# Altium PCB SixAxBase.PcbDoc
Units mm, origin at the board's own origin, x right, y up, seen from the top; angles counter-clockwise.
Board outline 152.4 x 101.6 mm, 4 copper layers (Top Layer, Signal Layer 1, Signal Layer 2, Bottom Layer), stack 0.778 mm thick; 1 components, 0 nets, 201 pads, 201 vias.
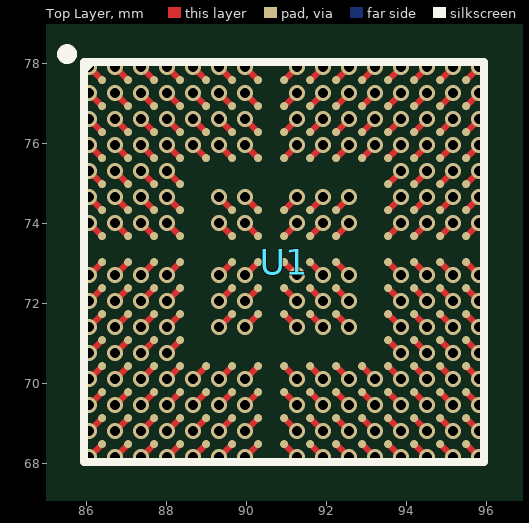
[diagram p0: Top Layer view]
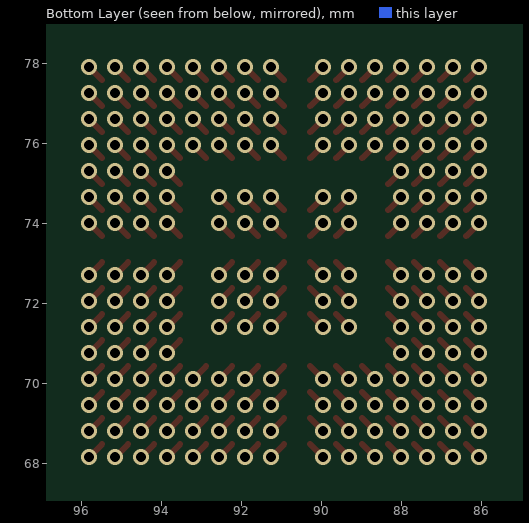
[diagram p1: Bottom Layer view, seen from below]
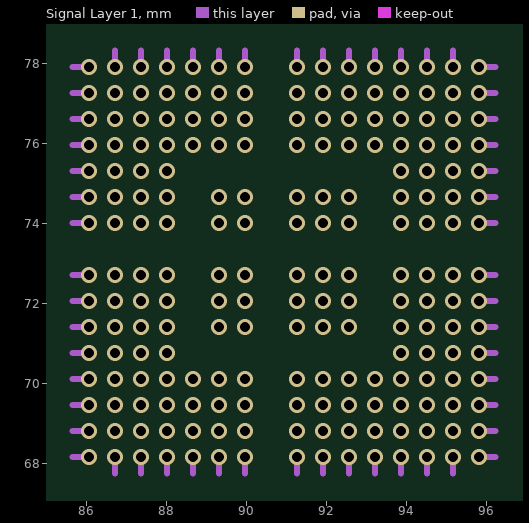
[diagram p2: Signal Layer 1]

## Layer stack, top to bottom
Top Solder: solder mask 0.0102, Solder Resist, Dk 3.5
Top Layer: signal copper 0.0356
Dielectric 1: core 0.254, FR-4, Dk 4.2
Signal Layer 1: signal copper 0.036
Dielectric 3: prepreg 0.127, Dk 4.2
Signal Layer 2: signal copper 0.036
Dielectric 2: core 0.254, Dk 4.2
Bottom Layer: signal copper 0.0356
Bottom Solder: solder mask 0.0102, Solder Resist, Dk 3.5

## Board outline
25.4,25.4 177.8,25.4 177.8,127 25.4,127

## Design rules (kind name [scope] priority, off if disabled: settings)
Clearance [All] p1: gap=0.127
ComponentClearance [All] p1: gap=0.127 collisioncheckmode=3 verticalgap=0.254 showdistances=FALSE
HoleToHoleClearance [All] p1: gap=0.127 allowstackedmicrovias=TRUE
MinimumSolderMaskSliver [All] p1: minsoldermaskwidth=0.127
PolygonConnect [All] p1: connectstyle=Relief reliefconductorwidth=0.254 reliefentries=4 polygonreliefangle="90 Angle" airgapwidth=0.254
RoutingVias [All] p1: holewidth=0.25 width=0.4 viastyle="Through Hole" minholewidth=0.25 minwidth=0.4 maxholewidth=0.3 maxwidth=0.5
SilkToSilkClearance [All] p1: silktosilkclearance=0.127
SilkToSolderMaskClearance [IsPad] p1: minsilkscreentomaskgap=0.127 clearancetoexposedcopper=TRUE
SolderMaskExpansion [All] p1: expansion=0.05
Width [All] p1: maxlimit=0.5 minlimit=0.127 preferedwidth=0.15
25 further rules are at their usual default settings.

## Components (designator, comment, footprint, x,y, rotation, side; value= is the part's Value field where it differs from the comment)
U1 "STM32F407IGH7" STM-UFBGA176+25 90.932,73.025 r0 top

## Footprints (in the part's own frame and the unit in brackets; to place one, negate y for a bottom-side part, rotate by r counter-clockwise, add the part's x,y. Pads: shape width x height; smd on the part's side, far side on the other; paste and mask are expansions set on the pad)
STM-UFBGA176+25 [mm] "BGA, 201-Balls, Body 10x10mm, Pitch 0.65mm"
  round 0.2 smd: A1(-4.55,4.55) A2(-3.9,4.55) A3(-3.25,4.55) A4(-2.6,4.55) A5(-1.95,4.55) A6(-1.3,4.55) A7(-0.65,4.55) A8(0,4.55) A9(0.65,4.55) A10(1.3,4.55) A11(1.95,4.55) A12(2.6,4.55) A13(3.25,4.55) A14(3.9,4.55) A15(4.55,4.55) B1(-4.55,3.9) B2(-3.9,3.9) B3(-3.25,3.9) B4(-2.6,3.9) B5(-1.95,3.9) B6(-1.3,3.9) B7(-0.65,3.9) B8(0,3.9) B9(0.65,3.9) B10(1.3,3.9) B11(1.95,3.9) B12(2.6,3.9) B13(3.25,3.9) B14(3.9,3.9) B15(4.55,3.9) C1(-4.55,3.25) C2(-3.9,3.25) C3(-3.25,3.25) C4(-2.6,3.25) C5(-1.95,3.25) C6(-1.3,3.25) C7(-0.65,3.25) C8(0,3.25) C9(0.65,3.25) C10(1.3,3.25) C11(1.95,3.25) C12(2.6,3.25) C13(3.25,3.25) C14(3.9,3.25) C15(4.55,3.25) D1(-4.55,2.6) D2(-3.9,2.6) D3(-3.25,2.6) D4(-2.6,2.6) D5(-1.95,2.6) D6(-1.3,2.6) D7(-0.65,2.6) D8(0,2.6) D9(0.65,2.6) D10(1.3,2.6) D11(1.95,2.6) D12(2.6,2.6) D13(3.25,2.6) D14(3.9,2.6) D15(4.55,2.6) E1(-4.55,1.95) E2(-3.9,1.95) E3(-3.25,1.95) E4(-2.6,1.95) E12(2.6,1.95) E13(3.25,1.95) E14(3.9,1.95) E15(4.55,1.95) F1(-4.55,1.3) F2(-3.9,1.3) F3(-3.25,1.3) F4(-2.6,1.3) F6(-1.3,1.3) F7(-0.65,1.3) F8(0,1.3) F9(0.65,1.3) F10(1.3,1.3) F12(2.6,1.3) F13(3.25,1.3) F14(3.9,1.3) F15(4.55,1.3) G1(-4.55,0.65) G2(-3.9,0.65) G3(-3.25,0.65) G4(-2.6,0.65) G6(-1.3,0.65) G7(-0.65,0.65) G8(0,0.65) G9(0.65,0.65) G10(1.3,0.65) G12(2.6,0.65) G13(3.25,0.65) G14(3.9,0.65) G15(4.55,0.65) H1(-4.55,0) H2(-3.9,0) H3(-3.25,0) H4(-2.6,0) H6(-1.3,0) H7(-0.65,0) H8(0,0) H9(0.65,0) H10(1.3,0) H12(2.6,0) H13(3.25,0) H14(3.9,0) H15(4.55,0) J1(-4.55,-0.65) J2(-3.9,-0.65) J3(-3.25,-0.65) J4(-2.6,-0.65) J6(-1.3,-0.65) J7(-0.65,-0.65) J8(0,-0.65) J9(0.65,-0.65) J10(1.3,-0.65) J12(2.6,-0.65) J13(3.25,-0.65) J14(3.9,-0.65) J15(4.55,-0.65) K1(-4.55,-1.3) K2(-3.9,-1.3) K3(-3.25,-1.3) K4(-2.6,-1.3) K6(-1.3,-1.3) K7(-0.65,-1.3) K8(0,-1.3) K9(0.65,-1.3) K10(1.3,-1.3) K12(2.6,-1.3) K13(3.25,-1.3) K14(3.9,-1.3) K15(4.55,-1.3) L1(-4.55,-1.95) L2(-3.9,-1.95) L3(-3.25,-1.95) L4(-2.6,-1.95) L12(2.6,-1.95) L13(3.25,-1.95) L14(3.9,-1.95) L15(4.55,-1.95) M1(-4.55,-2.6) M2(-3.9,-2.6) M3(-3.25,-2.6) M4(-2.6,-2.6) M5(-1.95,-2.6) M6(-1.3,-2.6) M7(-0.65,-2.6) M8(0,-2.6) M9(0.65,-2.6) M10(1.3,-2.6) M11(1.95,-2.6) M12(2.6,-2.6) M13(3.25,-2.6) M14(3.9,-2.6) M15(4.55,-2.6) N1(-4.55,-3.25) N2(-3.9,-3.25) N3(-3.25,-3.25) N4(-2.6,-3.25) N5(-1.95,-3.25) N6(-1.3,-3.25) N7(-0.65,-3.25) N8(0,-3.25) N9(0.65,-3.25) N10(1.3,-3.25) N11(1.95,-3.25) N12(2.6,-3.25) N13(3.25,-3.25) N14(3.9,-3.25) N15(4.55,-3.25) P1(-4.55,-3.9) P2(-3.9,-3.9) P3(-3.25,-3.9) P4(-2.6,-3.9) P5(-1.95,-3.9) P6(-1.3,-3.9) P7(-0.65,-3.9) P8(0,-3.9) P9(0.65,-3.9) P10(1.3,-3.9) P11(1.95,-3.9) P12(2.6,-3.9) P13(3.25,-3.9) P14(3.9,-3.9) P15(4.55,-3.9) R1(-4.55,-4.55) R2(-3.9,-4.55) R3(-3.25,-4.55) R4(-2.6,-4.55) R5(-1.95,-4.55) R6(-1.3,-4.55) R7(-0.65,-4.55) R8(0,-4.55) R9(0.65,-4.55) R10(1.3,-4.55) R11(1.95,-4.55) R12(2.6,-4.55) R13(3.25,-4.55) R14(3.9,-4.55) R15(4.55,-4.55)
  silkscreen extent -5.55,-5 5,5.32, body extent -5,-5 5,5, height 0.6

## Part data
U1: "ARM Cortex-M4 32-bit MCU+FPU, 210 DMIPS, 1024 kB Flash, 192 kB Internal RAM, 140 I/Os, 176-pin UFBGA, -40 to 105 degC, Tray"

## Via types
v1: diameter 0.4, hole 0.25, Top Layer to Bottom Layer, tented both sides, 201 vias

## Nets (pads, with @x,y where several pads share a name; then routed paths per layer and width w, separated by ;. In a path a pad name is that pad's centre, name@x,y a point inside that pad or via, vN(x,y) a via of type N, cw(c..) or ccw(c..) an arc to the next point about the centre after c; other vN are vias at no path point)
pads on no net: U1.A1 U1.A2 U1.A3 U1.A4 U1.A5 U1.A6 U1.A7 U1.A8 U1.A9 U1.A10 U1.A11 U1.A12 U1.A13 U1.A14 U1.A15 U1.B1 U1.B2 U1.B3 U1.B4 U1.B5 U1.B6 U1.B7 U1.B8 U1.B9 U1.B10 U1.B11 U1.B12 U1.B13 U1.B14 U1.B15 U1.C1 U1.C2 U1.C3 U1.C4 U1.C5 U1.C6 U1.C7 U1.C8 U1.C9 U1.C10 U1.C11 U1.C12 U1.C13 U1.C14 U1.C15 U1.D1 U1.D2 U1.D3 U1.D4 U1.D5 U1.D6 U1.D7 U1.D8 U1.D9 U1.D10 U1.D11 U1.D12 U1.D13 U1.D14 U1.D15 U1.E1 U1.E2 U1.E3 U1.E4 U1.E12 U1.E13 U1.E14 U1.E15 U1.F1 U1.F2 U1.F3 U1.F4 U1.F6 U1.F7 U1.F8 U1.F9 U1.F10 U1.F12 U1.F13 U1.F14 U1.F15 U1.G1 U1.G2 U1.G3 U1.G4 U1.G6 U1.G7 U1.G8 U1.G9 U1.G10 U1.G12 U1.G13 U1.G14 U1.G15 U1.H1 U1.H2 U1.H3 U1.H4 U1.H6 U1.H7 U1.H8 U1.H9 U1.H10 U1.H12 U1.H13 U1.H14 U1.H15 U1.J1 U1.J2 U1.J3 U1.J4 U1.J6 U1.J7 U1.J8 U1.J9 U1.J10 U1.J12 U1.J13 U1.J14 U1.J15 U1.K1 U1.K2 U1.K3 U1.K4 U1.K6 U1.K7 U1.K8 U1.K9 U1.K10 U1.K12 U1.K13 U1.K14 U1.K15 U1.L1 U1.L2 U1.L3 U1.L4 U1.L12 U1.L13 U1.L14 U1.L15 U1.M1 U1.M2 U1.M3 U1.M4 U1.M5 U1.M6 U1.M7 U1.M8 U1.M9 U1.M10 U1.M11 U1.M12 U1.M13 U1.M14 U1.M15 U1.N1 U1.N2 U1.N3 U1.N4 U1.N5 U1.N6 U1.N7 U1.N8 U1.N9 U1.N10 U1.N11 U1.N12 U1.N13 U1.N14 U1.N15 U1.P1 U1.P2 U1.P3 U1.P4 U1.P5 U1.P6 U1.P7 U1.P8 U1.P9 U1.P10 U1.P11 U1.P12 U1.P13 U1.P14 U1.P15 U1.R1 U1.R2 U1.R3 U1.R4 U1.R5 U1.R6 U1.R7 U1.R8 U1.R9 U1.R10 U1.R11 U1.R12 U1.R13 U1.R14 U1.R15
copper on no net: | length 115.3
  Top Layer w0.15: v1(86.057,68.15) 86.382,68.475 ; v1(86.057,68.8) 86.382,69.125 ; v1(86.057,69.45) 86.382,69.775 ; v1(86.057,70.1) 86.382,70.425 ; v1(86.057,70.75) 86.382,71.075 ; v1(86.057,71.4) 86.382,71.725 ; v1(86.057,72.05) 86.382,72.375 ; v1(86.057,72.7) 86.382,73.025 ; v1(86.057,74) 86.382,73.675 ; v1(86.057,74.65) 86.382,74.325 ; v1(86.057,75.3) 86.382,74.975 ; v1(86.057,75.95) 86.382,75.625 ; v1(86.057,76.6) 86.382,76.275 ; v1(86.057,77.25) 86.382,76.925 ; v1(86.057,77.9) 86.382,77.575 ; v1(86.707,68.15) 87.032,68.475 ; v1(86.707,68.8) 87.032,69.125 ; v1(86.707,69.45) 87.032,69.775 ; v1(86.707,70.1) 87.032,70.425 ; v1(86.707,70.75) 87.032,71.075 ; v1(86.707,71.4) 87.032,71.725 ; v1(86.707,72.05) 87.032,72.375 ; v1(86.707,72.7) 87.032,73.025 ; v1(86.707,74) 87.032,73.675 ; v1(86.707,74.65) 87.032,74.325 ; v1(86.707,75.3) 87.032,74.975 ; v1(86.707,75.95) 87.032,75.625 ; v1(86.707,76.6) 87.032,76.275 ; v1(86.707,77.25) 87.032,76.925 ; v1(86.707,77.9) 87.032,77.575 ; v1(87.357,68.15) 87.682,68.475 ; v1(87.357,68.8) 87.682,69.125 ; v1(87.357,69.45) 87.682,69.775 ; v1(87.357,70.1) 87.682,70.425 ; v1(87.357,70.75) 87.682,71.075 ; v1(87.357,71.4) 87.682,71.725 ; v1(87.357,72.05) 87.682,72.375 ; v1(87.357,72.7) 87.682,73.025 ; v1(87.357,74) 87.682,73.675 ; v1(87.357,74.65) 87.682,74.325 ; v1(87.357,75.3) 87.682,74.975 ; v1(87.357,75.95) 87.682,75.625 ; v1(87.357,76.6) 87.682,76.275 ; v1(87.357,77.25) 87.682,76.925 ; v1(87.357,77.9) 87.682,77.575 ; v1(88.007,68.15) 88.332,68.475 ; v1(88.007,68.8) 88.332,69.125 ; v1(88.007,69.45) 88.332,69.775 ; v1(88.007,70.1) 88.332,70.425 ; v1(88.007,70.75) 88.332,71.075 ; v1(88.007,71.4) 88.332,71.725 ; v1(88.007,72.05) 88.332,72.375 ; v1(88.007,72.7) 88.332,73.025 ; v1(88.007,74) 88.332,73.675 ; v1(88.007,74.65) 88.332,74.325 ; v1(88.007,75.3) 88.332,74.975 ; v1(88.007,75.95) 88.332,75.625 ; v1(88.007,76.6) 88.332,76.275 ; v1(88.007,77.25) 88.332,76.925 ; v1(88.007,77.9) 88.332,77.575 ; v1(88.657,68.15) 88.982,68.475 ; v1(88.657,68.8) 88.982,69.125 ; v1(88.657,69.45) 88.982,69.775 ; v1(88.657,70.1) 88.982,70.425 ; v1(88.657,75.95) 88.982,75.625 ; v1(88.657,76.6) 88.982,76.275 ; v1(88.657,77.25) 88.982,76.925 ; v1(88.657,77.9) 88.982,77.575 ; v1(89.307,68.15) 89.632,68.475 ; v1(89.307,68.8) 89.632,69.125 ; v1(89.307,69.45) 89.632,69.775 ; v1(89.307,70.1) 89.632,70.425 ; v1(89.307,71.4) 89.632,71.725 ; v1(89.307,72.05) 89.632,72.375 ; v1(89.307,72.7) 89.632,73.025 ; v1(89.307,74) 89.632,73.675 ; v1(89.307,74.65) 89.632,74.325 ; v1(89.307,75.95) 89.632,75.625 ; v1(89.307,76.6) 89.632,76.275 ; v1(89.307,77.25) 89.632,76.925 ; v1(89.307,77.9) 89.632,77.575 ; v1(89.957,68.15) 90.282,68.475 ; v1(89.957,68.8) 90.282,69.125 ; v1(89.957,69.45) 90.282,69.775 ; v1(89.957,70.1) 90.282,70.425 ; v1(89.957,71.4) 90.282,71.725 ; v1(89.957,72.05) 90.282,72.375 ; v1(89.957,72.7) 90.282,73.025 ; v1(89.957,74) 90.282,73.675 ; v1(89.957,74.65) 90.282,74.325 ; v1(89.957,75.95) 90.282,75.625 ; v1(89.957,76.6) 90.282,76.275 ; v1(89.957,77.25) 90.282,76.925 ; v1(89.957,77.9) 90.282,77.575 ; 90.932,68.475 v1(91.257,68.15) ; 90.932,69.125 v1(91.257,68.8) ; 90.932,69.775 v1(91.257,69.45) ; 90.932,70.425 v1(91.257,70.1) ; 90.932,71.725 v1(91.257,71.4) ; 90.932,72.375 v1(91.257,72.05) ; 90.932,73.025 v1(91.257,72.7) ; 90.932,73.675 v1(91.257,74) ; 90.932,74.325 v1(91.257,74.65) ; 90.932,75.625 v1(91.257,75.95) ; 90.932,76.275 v1(91.257,76.6) ; 90.932,76.925 v1(91.257,77.25) ; 90.932,77.575 v1(91.257,77.9) ; 91.582,68.475 v1(91.907,68.15) ; 91.582,69.125 v1(91.907,68.8) ; 91.582,69.775 v1(91.907,69.45) ; 91.582,70.425 v1(91.907,70.1) ; 91.582,71.725 v1(91.907,71.4) ; 91.582,72.375 v1(91.907,72.05) ; 91.582,73.025 v1(91.907,72.7) ; 91.582,73.675 v1(91.907,74) ; 91.582,74.325 v1(91.907,74.65) ; 91.582,75.625 v1(91.907,75.95) ; 91.582,76.275 v1(91.907,76.6) ; 91.582,76.925 v1(91.907,77.25) ; 91.582,77.575 v1(91.907,77.9) ; 92.232,68.475 v1(92.557,68.15) ; 92.232,69.125 v1(92.557,68.8) ; 92.232,69.775 v1(92.557,69.45) ; 92.232,70.425 v1(92.557,70.1) ; 92.232,71.725 v1(92.557,71.4) ; 92.232,72.375 v1(92.557,72.05) ; 92.232,73.025 v1(92.557,72.7) ; 92.232,73.675 v1(92.557,74) ; 92.232,74.325 v1(92.557,74.65) ; 92.232,75.625 v1(92.557,75.95) ; 92.232,76.275 v1(92.557,76.6) ; 92.232,76.925 v1(92.557,77.25) ; 92.232,77.575 v1(92.557,77.9) ; 92.882,68.475 v1(93.207,68.15) ; 92.882,69.125 v1(93.207,68.8) ; 92.882,69.775 v1(93.207,69.45) ; 92.882,70.425 v1(93.207,70.1) ; 92.882,75.625 v1(93.207,75.95) ; 92.882,76.275 v1(93.207,76.6) ; 92.882,76.925 v1(93.207,77.25) ; 92.882,77.575 v1(93.207,77.9) ; 93.532,68.475 v1(93.857,68.15) ; 93.532,69.125 v1(93.857,68.8) ; 93.532,69.775 v1(93.857,69.45) ; 93.532,70.425 v1(93.857,70.1) ; 93.532,71.075 v1(93.857,70.75) ; 93.532,71.725 v1(93.857,71.4) ; 93.532,72.375 v1(93.857,72.05) ; 93.532,73.025 v1(93.857,72.7) ; 93.532,73.675 v1(93.857,74) ; 93.532,74.325 v1(93.857,74.65) ; 93.532,74.975 v1(93.857,75.3) ; 93.532,75.625 v1(93.857,75.95) ; 93.532,76.275 v1(93.857,76.6) ; 93.532,76.925 v1(93.857,77.25) ; 93.532,77.575 v1(93.857,77.9) ; 94.182,68.475 v1(94.507,68.15) ; 94.182,69.125 v1(94.507,68.8) ; 94.182,69.775 v1(94.507,69.45) ; 94.182,70.425 v1(94.507,70.1) ; 94.182,71.075 v1(94.507,70.75) ; 94.182,71.725 v1(94.507,71.4) ; 94.182,72.375 v1(94.507,72.05) ; 94.182,73.025 v1(94.507,72.7) ; 94.182,73.675 v1(94.507,74) ; 94.182,74.325 v1(94.507,74.65) ; 94.182,74.975 v1(94.507,75.3) ; 94.182,75.625 v1(94.507,75.95) ; 94.182,76.275 v1(94.507,76.6) ; 94.182,76.925 v1(94.507,77.25) ; 94.182,77.575 v1(94.507,77.9) ; 94.832,68.475 v1(95.157,68.15) ; 94.832,69.125 v1(95.157,68.8) ; 94.832,69.775 v1(95.157,69.45) ; 94.832,70.425 v1(95.157,70.1) ; 94.832,71.075 v1(95.157,70.75) ; 94.832,71.725 v1(95.157,71.4) ; 94.832,72.375 v1(95.157,72.05) ; 94.832,73.025 v1(95.157,72.7) ; 94.832,73.675 v1(95.157,74) ; 94.832,74.325 v1(95.157,74.65) ; 94.832,74.975 v1(95.157,75.3) ; 94.832,75.625 v1(95.157,75.95) ; 94.832,76.275 v1(95.157,76.6) ; 94.832,76.925 v1(95.157,77.25) ; 94.832,77.575 v1(95.157,77.9) ; 95.482,68.475 v1(95.807,68.15) ; 95.482,69.125 v1(95.807,68.8) ; 95.482,69.775 v1(95.807,69.45) ; 95.482,70.425 v1(95.807,70.1) ; 95.482,71.075 v1(95.807,70.75) ; 95.482,71.725 v1(95.807,71.4) ; 95.482,72.375 v1(95.807,72.05) ; 95.482,73.025 v1(95.807,72.7) ; 95.482,73.675 v1(95.807,74) ; 95.482,74.325 v1(95.807,74.65) ; 95.482,74.975 v1(95.807,75.3) ; 95.482,75.625 v1(95.807,75.95) ; 95.482,76.275 v1(95.807,76.6) ; 95.482,76.925 v1(95.807,77.25) ; 95.482,77.575 v1(95.807,77.9)
  Signal Layer 1 w0.15: 85.647,68.15 v1(86.057,68.15) ; 85.647,68.8 v1(86.057,68.8) ; 85.647,69.45 v1(86.057,69.45) ; 85.647,70.1 v1(86.057,70.1) ; 85.647,70.75 v1(86.057,70.75) ; 85.647,71.4 v1(86.057,71.4) ; 85.647,72.05 v1(86.057,72.05) ; 85.647,72.7 v1(86.057,72.7) ; 85.647,74 v1(86.057,74) ; 85.647,74.65 v1(86.057,74.65) ; 85.647,75.3 v1(86.057,75.3) ; 85.647,75.95 v1(86.057,75.95) ; 85.647,76.6 v1(86.057,76.6) ; 85.647,77.25 v1(86.057,77.25) ; 85.647,77.9 v1(86.057,77.9) ; 86.707,67.74 v1(86.707,68.15) ; v1(86.707,77.9) 86.707,78.31 ; 87.357,67.74 v1(87.357,68.15) ; v1(87.357,77.9) 87.357,78.31 ; 88.007,67.74 v1(88.007,68.15) ; v1(88.007,77.9) 88.007,78.31 ; 88.657,67.74 v1(88.657,68.15) ; v1(88.657,77.9) 88.657,78.31 ; 89.307,67.74 v1(89.307,68.15) ; v1(89.307,77.9) 89.307,78.31 ; 89.957,67.74 v1(89.957,68.15) ; v1(89.957,77.9) 89.957,78.31 ; 91.257,67.74 v1(91.257,68.15) ; v1(91.257,77.9) 91.257,78.31 ; 91.907,67.74 v1(91.907,68.15) ; v1(91.907,77.9) 91.907,78.31 ; 92.557,67.74 v1(92.557,68.15) ; v1(92.557,77.9) 92.557,78.31 ; 93.207,67.74 v1(93.207,68.15) ; v1(93.207,77.9) 93.207,78.31 ; 93.857,67.74 v1(93.857,68.15) ; v1(93.857,77.9) 93.857,78.31 ; 94.507,67.74 v1(94.507,68.15) ; v1(94.507,77.9) 94.507,78.31 ; 95.157,67.74 v1(95.157,68.15) ; v1(95.157,77.9) 95.157,78.31 ; v1(95.807,68.15) 96.217,68.15 ; v1(95.807,68.8) 96.217,68.8 ; v1(95.807,69.45) 96.217,69.45 ; v1(95.807,70.1) 96.217,70.1 ; v1(95.807,70.75) 96.217,70.75 ; v1(95.807,71.4) 96.217,71.4 ; v1(95.807,72.05) 96.217,72.05 ; v1(95.807,72.7) 96.217,72.7 ; v1(95.807,74) 96.217,74 ; v1(95.807,74.65) 96.217,74.65 ; v1(95.807,75.3) 96.217,75.3 ; v1(95.807,75.95) 96.217,75.95 ; v1(95.807,76.6) 96.217,76.6 ; v1(95.807,77.25) 96.217,77.25 ; v1(95.807,77.9) 96.217,77.9